# Altium PCB GSM.PcbDoc (part 2 of 2)
Units mm, origin at the board's own origin, x right, y up, seen from the top; angles counter-clockwise.
Board outline 52.5 x 130 mm, 2 copper layers (Top Layer, Bottom Layer); 68 components, 56 nets, 259 pads, 68 vias.
Unrouted connection lines stored in the file: 1.
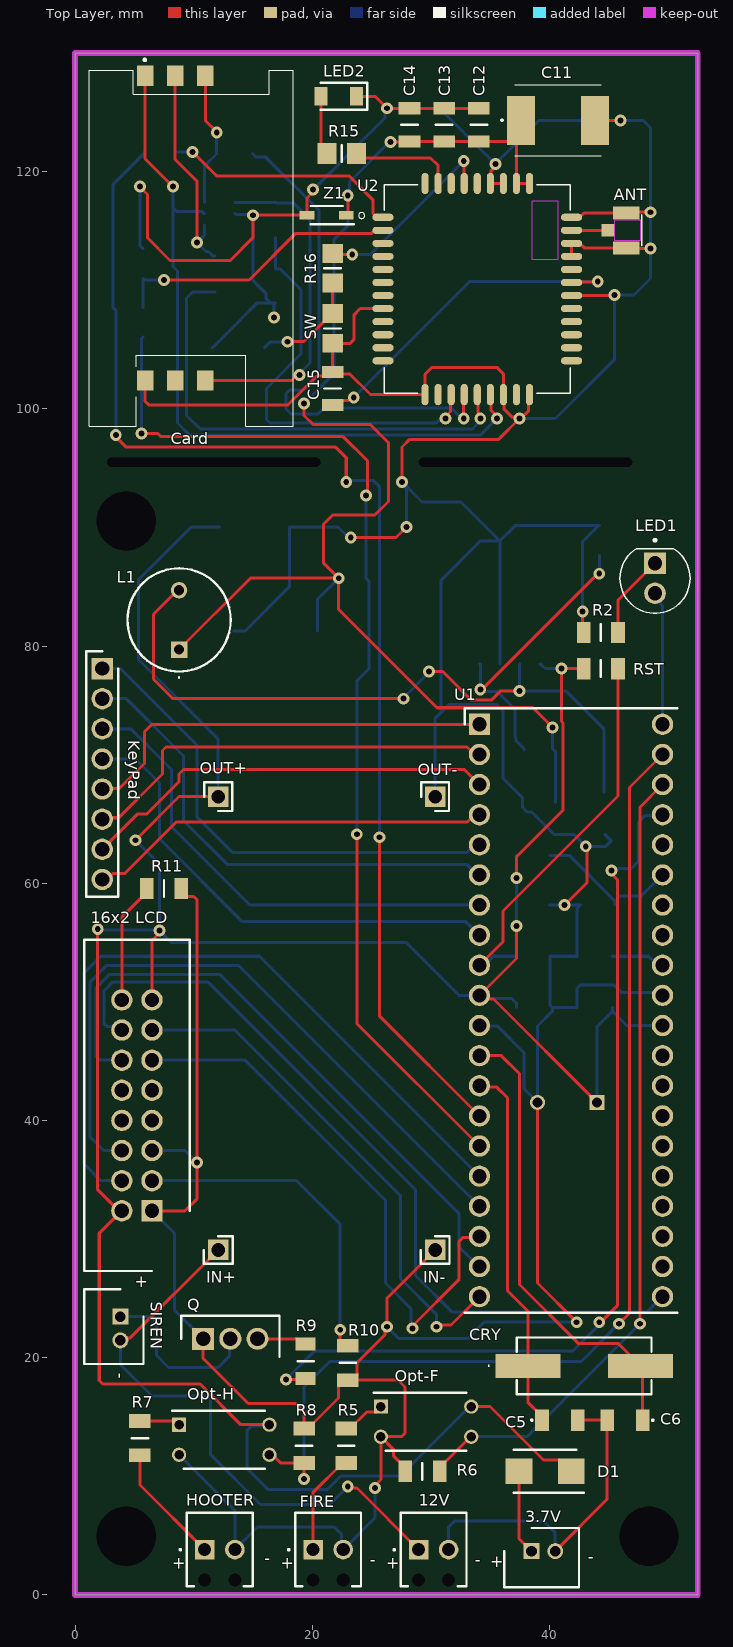
[diagram p0: Top Layer view]

## Via types
v1: diameter 1, hole 0.5, Top Layer to Bottom Layer, 68 vias

## Nets (pads, with @x,y where several pads share a name; then routed paths per layer and width w, separated by ;. In a path a pad name is that pad's centre, name@x,y a point inside that pad or via, vN(x,y) a via of type N, cw(c..) or ccw(c..) an arc to the next point about the centre after c; other vN are vias at no path point) (continued)
"SM CLK": (continued)
  Top Layer w0.254: v1(32.766,99.187) 32.743,99.21 32.743,101.143 U2.16
  Bottom Layer w0.254: R20.1 15.268,121.233 16.078,121.233 20.574,116.737 20.574,102.87 19.304,101.6 18.078,101.6 17.78,101.302 17.78,99.993 18.197,99.576 20.499,99.576 20.999,100.076 31.707,100.076 32.596,99.187 v1(32.766,99.187)
"SM DATA": C17.1 R21.2 U2.15 | length 35.3
  Top Layer w0.254: v1(31.242,99.187) 31.242,99.389 31.643,99.79 31.643,101.143 U2.15
  Bottom Layer w0.254: R21.2 C17.1 17.311,111.783 19.05,110.044 19.05,104.648 16.129,101.727 16.129,99.104 16.427,98.806 30.444,98.806 30.683,99.044 31.099,99.044 v1(31.242,99.187)
"SM RST": R19.1 U2.17 | length 40.4
  Top Layer w0.254: U2.17 33.975,101.143 33.975,99.577 34.163,99.389 v1(34.163,99.187)
  Bottom Layer w0.254: R19.1 9.93,109.879 9.398,109.347 9.398,99.441 10.541,98.298 33.508,98.298 33.806,98.596 33.806,98.628 34.163,98.985 v1(34.163,99.187)
"SM VDD": C16.1 Card.1 D.5 U2.18 | length 63.4
  Top Layer w0.254: Card.1 5.899,121.101 v1(8.255,118.745) ; U2.18 35.075,101.143 35.075,99.874 35.56,99.389 v1(35.56,99.187)
  Bottom Layer w0.254: v1(8.255,118.745) 8.255,116.97 C16.1 ; D.5 10.719,116.632 8.593,116.632 C16.1 ; v1(35.56,99.187) 34.163,97.79 9.652,97.79 8.636,98.806 8.636,111.633 8.258,112.011 C16.1
SPA3: R9.1 U1.37 | length 77.5
  Top Layer w0.254: v1(17.78,18.161) 19.357,18.161 R9.1 ; v1(44.196,22.987) 44.323,22.987 45.72,24.384 45.72,60.325 45.085,60.96 v1(45.212,61.087)
  Bottom Layer w0.254: v1(17.78,18.161) 20.193,20.574 41.985,20.574 44.196,22.785 v1(44.196,22.987) ; v1(45.212,61.087) 45.355,61.23 46.879,61.23 47.498,61.849 47.498,65.151 48.074,65.727 49.471,65.727 U1.37
TXD: R22.2 U1.14 | length 107.1
  Top Layer w0.254: v1(3.429,97.79) 3.429,97.648 4.303,96.774 21.971,96.774 22.86,95.885 v1(22.86,93.853) ; v1(25.654,63.881) 25.654,48.822 U1.14
  Bottom Layer w0.254: v1(3.429,97.79) 3.429,108.321 3.175,108.575 3.175,118.904 5.862,121.591 R22.2 ; v1(22.86,93.853) 22.987,93.98 25.146,93.98 25.654,93.472 v1(25.654,63.881)
X1: C5.1 CRY.1 U1.13 | length 31.2
  Top Layer w0.254: U1.13 34.176,42.84 35.519,42.84 36.449,41.91 36.449,25.654 38.176,23.927 CRY.1 38.176,16.251 39.37,15.057 C5.1
X2: C6.1 CRY.2 U1.12 | length 39.5
  Top Layer w0.254: U1.12 35.941,45.466 37.465,43.942 37.465,26.162 42.418,21.209 45.771,21.209 CRY.2 47.855,19.125 C6.1
pads on no net: 12V.MH1 12V.MH2 "16x2 LCD.7" "16x2 LCD.8" "16x2 LCD.9" "16x2 LCD.10" Card.6 D.3 FIRE.MH1 FIRE.MH2 HOOTER.MH1 HOOTER.MH2 IC1.5 U1.22 U1.23 U1.24 U1.25 U1.26 U1.27 U1.28 U1.29 U1.33 U1.34 U1.36 U2.3 U2.4 U2.5 U2.6 U2.7 U2.9 U2.10 U2.11 U2.12 U2.14 U2.20 U2.22 U2.23 U2.24 U2.25 U2.26 U2.29 U2.38 U2.40 U2.42

## Keep-outs
Keep-Out Layer:
  the board outline again, w0.5

## Silkscreen, mask and mechanical layers (free items; w line width, h text height)
Top Overlay:
  text "+" at 5.026,25.941 h1
  text "-" at 4.11,18.234 h1 r90
  text "-" at 43.742,3.475 h1 r180
  text "-" at 16.437,3.348 h1 r180
  text "-" at 25.327,3.221 h1 r180
  text "-" at 34.217,3.221 h1 r180
  text "+" at 34.998,2.319 h1
  text "+" at 8.201,2.192 h1
  text "+" at 17.345,2.192 h1
  text "+" at 26.235,2.192 h1